# Altium PCB x-Diodes on Back SIde.PcbDoc
Units mm, origin at the board's own origin, x right, y up, seen from the top; angles counter-clockwise.
Board outline 326 x 80 mm, 2 copper layers (Top Layer, Bottom Layer); 161 components, 66 nets, 322 pads, 38 vias.
Unrouted connection lines stored in the file: 8.
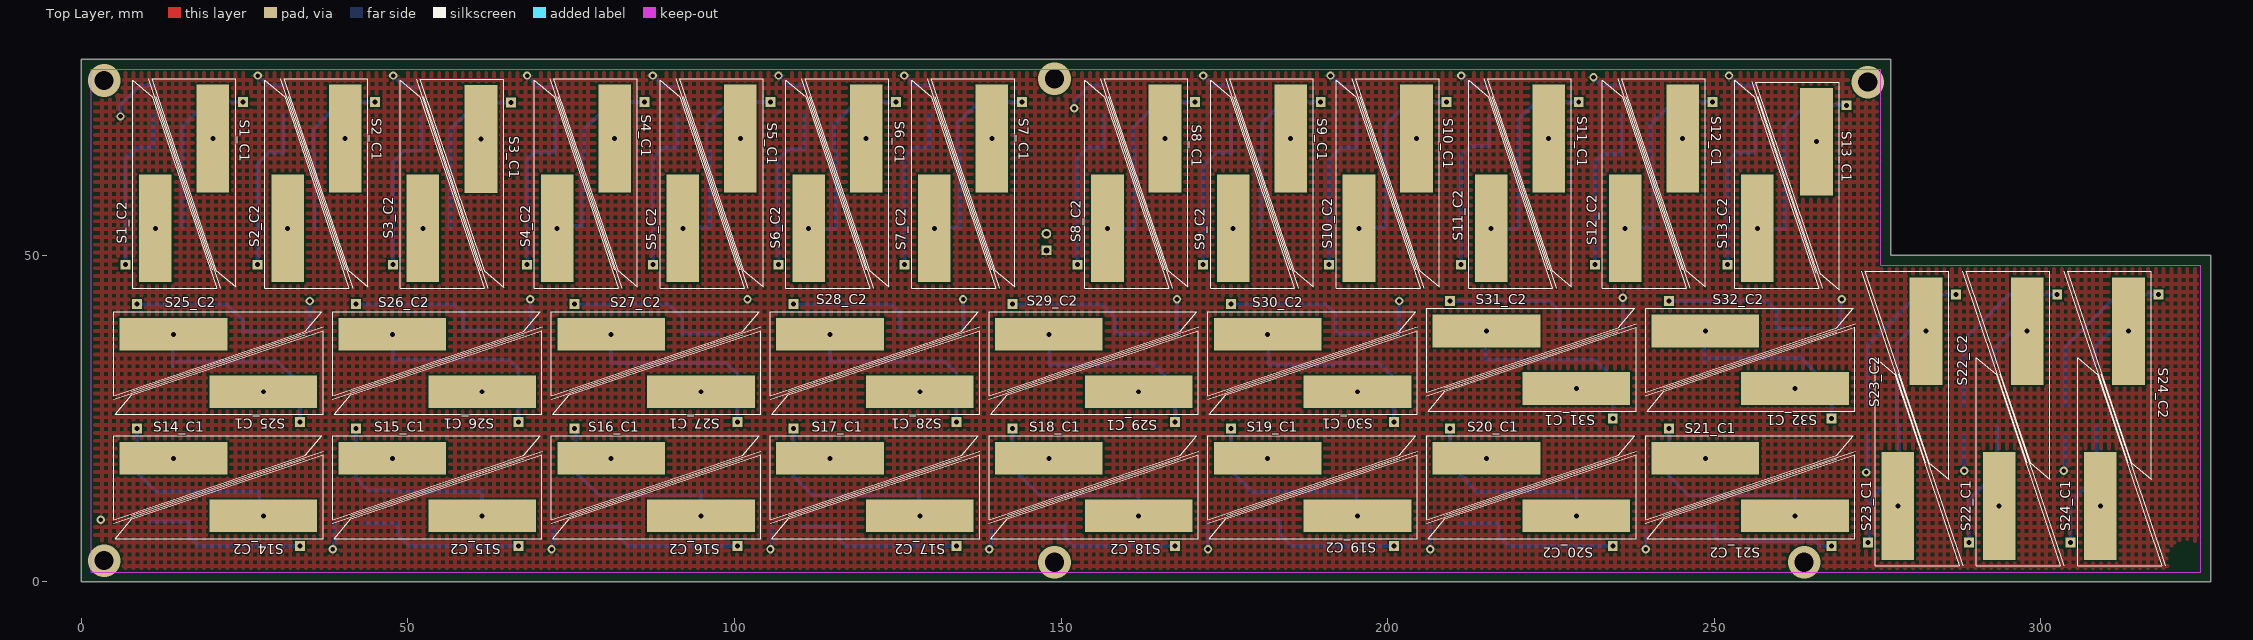
[diagram p0: Top Layer view]
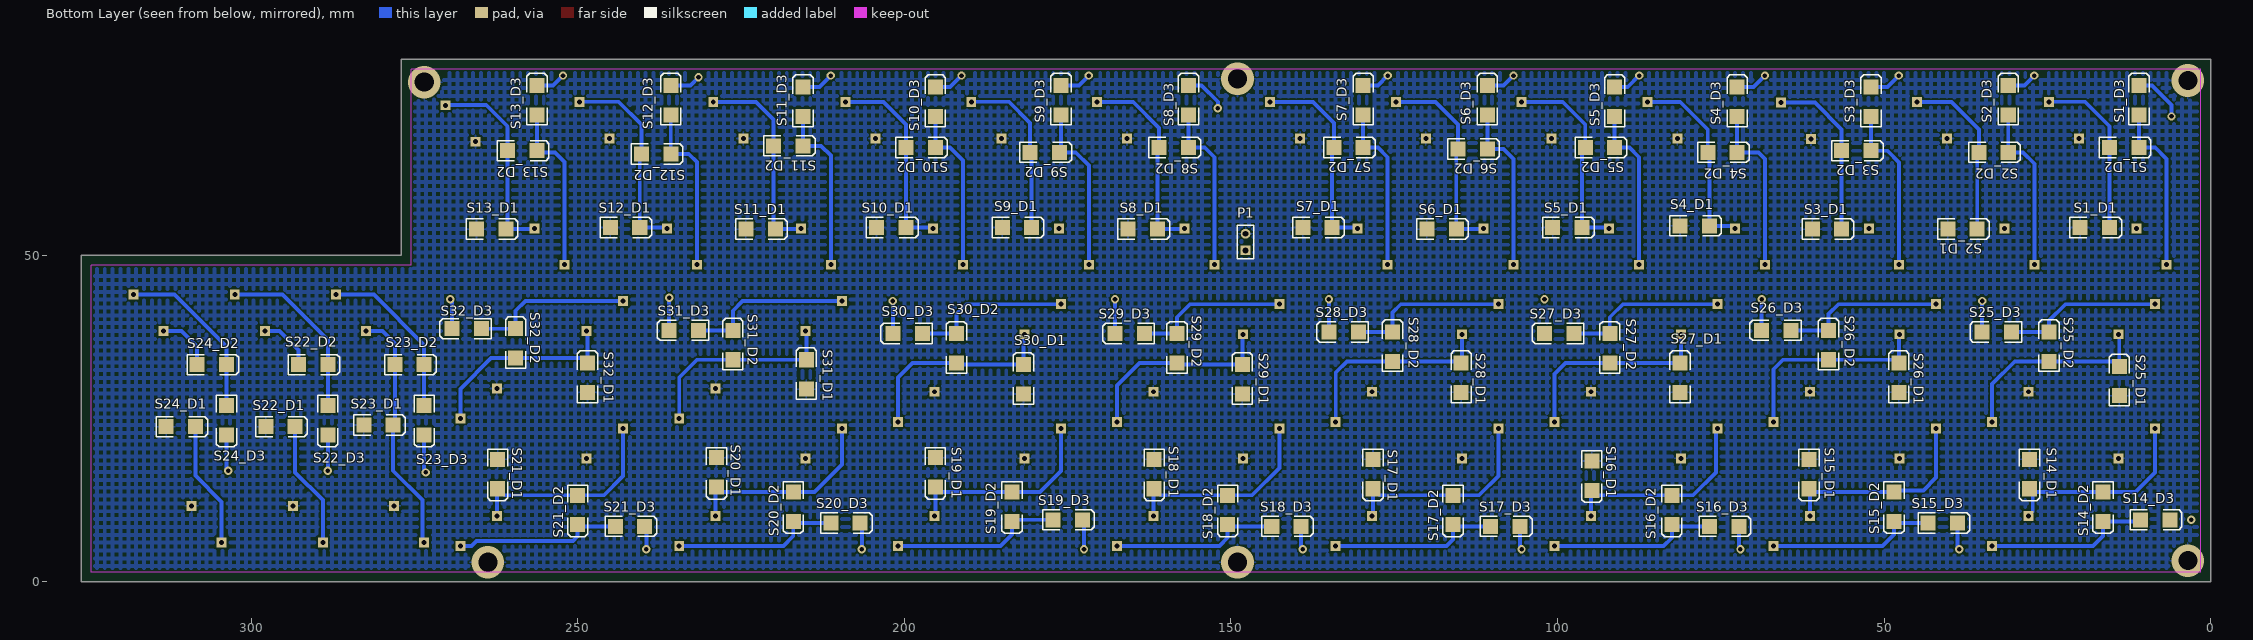
[diagram p1: Bottom Layer view, seen from below]

## Layer stack, top to bottom
Top Solder: solder mask 0.0102, Solder Resist, Dk 3.5
Top Layer: signal copper 0.0356
Dielectric 1: dielectric 0.32, FR-4, Dk 4.8
Bottom Layer: signal copper 0.0356
Bottom Solder: solder mask 0.0102, Solder Resist, Dk 3.5

## Board outline
0,0 326,0 326,50 277,50 277,80 0,80

## Design rules (kind name [scope] priority, off if disabled: settings)
Clearance [All] p1: gap=0.254
MinimumSolderMaskSliver [All] p1: minsoldermaskwidth=0.025
PolygonConnect [All] p1: connectstyle=Relief reliefconductorwidth=0.254 reliefentries=4 polygonreliefangle="90 Angle" airgapwidth=0.254
RoomDefinition "x-Diodes on Back Side" [InComponentClass('x-Diodes on Back Side')] p1: confinementstyle=ConfineIn formatcopy=TRUE lockcomponents=FALSE outline -292,-78 -241.2,-78 -241.2,-52.6 -292,-52.6
RoutingVias [All] p1: holewidth=0.711 width=1.27 viastyle="Through Hole" minholewidth=0.711 minwidth=1.27 maxholewidth=0.711 maxwidth=1.27
SilkToSolderMaskClearance [IsPad] p1: minsilkscreentomaskgap=0.025 clearancetoexposedcopper=TRUE
SolderMaskExpansion [All] p1: expansion=0.102
Width [All] p1: maxlimit=0.6 minlimit=0.6 preferedwidth=0.6
28 further rules are at their usual default settings.

## Components (designator, comment, footprint, x,y, rotation, side; value= is the part's Value field where it differs from the comment)
P1 "Header 2" HDR1X2 147.75,50.75 r90 bottom
S1_C1 "TASC" PCBComponent_1 24.75,73.5 r180 top
S1_C2 "TASC" PCBComponent_1 6.75,48.5 r0 top
S1_D1 "D Schottky" SMB 17.75,54.25 r180 bottom
S1_D2 "D Schottky" SMB 13.25,66.5 r180 bottom
S1_D3 "D Schottky" SMB 11,73.75 r90 bottom
S2_C1 "TASC" PCBComponent_1 45,73.5 r180 top
S2_C2 "TASC" PCBComponent_1 27,48.5 r0 top
S2_D1 "D Schottky" SMB 38,54 r180 bottom
S2_D2 "D Schottky" SMB 33.25,65.75 r180 bottom
S2_D3 "D Schottky" SMB 31,73.75 r90 bottom
S3_C1 "TASC" PCBComponent_1 65.8,73.4 r180 top
S3_C2 "TASC" PCBComponent_1 47.7,48.5 r0 top
S3_D1 "D Schottky" SMB 58.75,54 r180 bottom
S3_D2 "D Schottky" SMB 54.25,66 r180 bottom
S3_D3 "D Schottky" SMB 52,73.5 r90 bottom
S4_C1 "TASC" PCBComponent_1 86.25,73.5 r180 top
S4_C2 "TASC" PCBComponent_1 68.25,48.5 r0 top
S4_D1 "D Schottky" SMB 79,54.5 r180 bottom
S4_D2 "D Schottky" SMB 74.75,65.75 r180 bottom
S4_D3 "D Schottky" SMB 72.5,73.5 r90 bottom
S5_C1 "TASC" PCBComponent_1 105.5,73.5 r180 top
S5_C2 "TASC" PCBComponent_1 87.5,48.5 r0 top
S5_D1 "D Schottky" SMB 98.5,54.25 r180 bottom
S5_D2 "D Schottky" SMB 93.5,66.5 r180 bottom
S5_D3 "D Schottky" SMB 91.25,73.5 r90 bottom
S6_C1 "TASC" PCBComponent_1 124.75,73.5 r180 top
S6_C2 "TASC" PCBComponent_1 106.75,48.5 r0 top
S6_D1 "D Schottky" SMB 117.75,54 r180 bottom
S6_D2 "D Schottky" SMB 113,66.25 r180 bottom
S6_D3 "D Schottky" SMB 110.75,73.75 r90 bottom
S7_C1 "TASC" PCBComponent_1 144,73.5 r180 top
S7_C2 "TASC" PCBComponent_1 126,48.5 r0 top
S7_D1 "D Schottky" SMB 136.75,54.25 r180 bottom
S7_D2 "D Schottky" SMB 132,66.5 r180 bottom
S7_D3 "D Schottky" SMB 129.75,73.75 r90 bottom
S8_C1 "TASC" PCBComponent_1 170.5,73.5 r180 top
S8_C2 "TASC" PCBComponent_1 152.5,48.5 r0 top
S8_D1 "D Schottky" SMB 163.5,54 r180 bottom
S8_D2 "D Schottky" SMB 158.75,66.5 r180 bottom
S8_D3 "D Schottky" SMB 156.5,73.75 r90 bottom
S9_C1 "TASC" PCBComponent_1 189.75,73.5 r180 top
S9_C2 "TASC" PCBComponent_1 171.75,48.5 r0 top
S9_D1 "D Schottky" SMB 182.75,54.25 r180 bottom
S9_D2 "D Schottky" SMB 178.5,65.75 r180 bottom
S9_D3 "D Schottky" SMB 176,73.75 r90 bottom
S10_C1 "TASC" PCBComponent_1 209,73.5 r180 top
S10_C2 "TASC" PCBComponent_1 191,48.5 r0 top
S10_D1 "D Schottky" SMB 202,54.25 r180 bottom
S10_D2 "D Schottky" SMB 197.5,66.5 r180 bottom
S10_D3 "D Schottky" SMB 195.25,73.5 r90 bottom
S11_C1 "TASC" PCBComponent_1 229.25,73.5 r180 top
S11_C2 "TASC" PCBComponent_1 211.25,48.5 r0 top
S11_D1 "D Schottky" SMB 222,54 r180 bottom
S11_D2 "D Schottky" SMB 217.75,66.75 r180 bottom
S11_D3 "D Schottky" SMB 215.5,73.5 r90 bottom
S12_C1 "TASC" PCBComponent_1 249.75,73.5 r180 top
S12_C2 "TASC" PCBComponent_1 231.75,48.5 r0 top
S12_D1 "D Schottky" SMB 242.75,54.25 r180 bottom
S12_D2 "D Schottky" SMB 238,65.5 r180 bottom
S12_D3 "D Schottky" SMB 235.75,73.75 r90 bottom
S13_C1 "TASC" PCBComponent_1 270.25,73 r180 top
S13_C2 "TASC" PCBComponent_1 252,48.5 r0 top
S13_D1 "D Schottky" SMB 263.25,54 r180 bottom
S13_D2 "D Schottky" SMB 258.5,66 r180 bottom
S13_D3 "D Schottky" SMB 256.25,73.75 r90 bottom
S14_C1 "TASC" PCBComponent_1 8.5,23.5 r270 top
S14_C2 "TASC" PCBComponent_1 33.5,5.5 r90 top
S14_D1 "D Schottky" SMB 27.75,16.5 r270 bottom
S14_D2 "D Schottky" SMB 16.5,11.5 r270 bottom
S14_D3 "D Schottky" SMB 8.5,9.5 r180 bottom
S15_C1 "TASC" PCBComponent_1 42,23.5 r270 top
S15_C2 "TASC" PCBComponent_1 67,5.5 r90 top
S15_D1 "D Schottky" SMB 61.5,16.5 r270 bottom
S15_D2 "D Schottky" SMB 48.5,11.5 r270 bottom
S15_D3 "D Schottky" SMB 41,9 r180 bottom
S16_C1 "TASC" PCBComponent_1 75.5,23.5 r270 top
S16_C2 "TASC" PCBComponent_1 100.5,5.5 r90 top
S16_D1 "D Schottky" SMB 94.75,16.25 r270 bottom
S16_D2 "D Schottky" SMB 82.5,11 r270 bottom
S16_D3 "D Schottky" SMB 74.5,8.5 r180 bottom
S17_C1 "TASC" PCBComponent_1 109,23.5 r270 top
S17_C2 "TASC" PCBComponent_1 134,5.5 r90 top
S17_D1 "D Schottky" SMB 128.25,16.5 r270 bottom
S17_D2 "D Schottky" SMB 116,11 r270 bottom
S17_D3 "D Schottky" SMB 108,8.5 r180 bottom
S18_C1 "TASC" PCBComponent_1 142.5,23.5 r270 top
S18_C2 "TASC" PCBComponent_1 167.5,5.5 r90 top
S18_D1 "D Schottky" SMB 161.75,16.5 r270 bottom
S18_D2 "D Schottky" SMB 150.5,11 r270 bottom
S18_D3 "D Schottky" SMB 141.5,8.5 r180 bottom
S19_C1 "TASC" PCBComponent_1 176,23.5 r270 top
S19_C2 "TASC" PCBComponent_1 201,5.5 r90 top
S19_D1 "D Schottky" SMB 195.25,16.75 r270 bottom
S19_D2 "D Schottky" SMB 183.5,11.5 r270 bottom
S19_D3 "D Schottky" SMB 175,9.5 r180 bottom
S20_C1 "TASC" PCBComponent_1 209.5,23.5 r270 top
S20_C2 "TASC" PCBComponent_1 234.5,5.5 r90 top
S20_D1 "D Schottky" SMB 228.75,16.75 r270 bottom
S20_D2 "D Schottky" SMB 217,11.5 r270 bottom
S20_D3 "D Schottky" SMB 209,9 r180 bottom
S21_C1 "TASC" PCBComponent_1 243,23.5 r270 top
S21_C2 "TASC" PCBComponent_1 268,5.5 r90 top
S21_D1 "D Schottky" SMB 262.25,16.5 r270 bottom
S21_D2 "D Schottky" SMB 250,11 r270 bottom
S21_D3 "D Schottky" SMB 242,8.5 r180 bottom
S22_C1 "TASC" PCBComponent_1 289,6 r0 top
S22_C2 "TASC" PCBComponent_1 302.5,44 r180 top
S22_D1 "D Schottky" SMB 295.5,23.75 r180 bottom
S22_D2 "D Schottky" SMB 290.5,33.25 r180 bottom
S22_D3 "D Schottky" SMB 288.25,24.75 r270 bottom
S23_C1 "TASC" PCBComponent_1 273.5,6 r0 top
S23_C2 "TASC" PCBComponent_1 287,44 r180 top
S23_D1 "D Schottky" SMB 280.5,24 r180 bottom
S23_D2 "D Schottky" SMB 275.75,33.25 r180 bottom
S23_D3 "D Schottky" SMB 273.5,24.75 r270 bottom
S24_C1 "TASC" PCBComponent_1 304.5,6 r0 top
S24_C2 "TASC" PCBComponent_1 318,44 r180 top
S24_D1 "D Schottky" SMB 310.75,23.75 r180 bottom
S24_D2 "D Schottky" SMB 306,33.25 r180 bottom
S24_D3 "D Schottky" SMB 303.75,24.75 r270 bottom
S25_C1 "TASC" PCBComponent_1 33.5,24.5 r90 top
S25_C2 "TASC" PCBComponent_1 8.5,42.5 r270 top
S25_D1 "D Schottky" SMB 14,30.75 r90 bottom
S25_D2 "D Schottky" SMB 24.75,36 r90 bottom
S25_D3 "D Schottky" SMB 32.75,38.25 r0 bottom
S26_C1 "TASC" PCBComponent_1 67,24.5 r90 top
S26_C2 "TASC" PCBComponent_1 42,42.5 r270 top
S26_D1 "D Schottky" SMB 47.75,31.25 r90 bottom
S26_D2 "D Schottky" SMB 58.5,36.25 r90 bottom
S26_D3 "D Schottky" SMB 66.5,38.5 r0 bottom
S27_C1 "TASC" PCBComponent_1 100.5,24.5 r90 top
S27_C2 "TASC" PCBComponent_1 75.5,42.5 r270 top
S27_D1 "D Schottky" SMB 81.25,31.25 r90 bottom
S27_D2 "D Schottky" SMB 92,35.75 r90 bottom
S27_D3 "D Schottky" SMB 99.75,38 r0 bottom
S28_C1 "TASC" PCBComponent_1 134,24.5 r90 top
S28_C2 "TASC" PCBComponent_1 109,42.5 r270 top
S28_D1 "D Schottky" SMB 114.75,31.25 r90 bottom
S28_D2 "D Schottky" SMB 125.25,36 r90 bottom
S28_D3 "D Schottky" SMB 132.75,38.25 r0 bottom
S29_C1 "TASC" PCBComponent_1 167.5,24.5 r90 top
S29_C2 "TASC" PCBComponent_1 142.5,42.5 r270 top
S29_D1 "D Schottky" SMB 148.25,31 r90 bottom
S29_D2 "D Schottky" SMB 158.25,35.75 r90 bottom
S29_D3 "D Schottky" SMB 165.5,38 r0 bottom
S30_C1 "TASC" PCBComponent_1 201,24.5 r90 top
S30_C2 "TASC" PCBComponent_1 176,42.5 r270 top
S30_D1 "D Schottky" SMB 181.75,31 r90 bottom
S30_D2 "D Schottky" SMB 192,35.75 r90 bottom
S30_D3 "D Schottky" SMB 199.5,38 r0 bottom
S31_C1 "TASC" PCBComponent_1 234.5,25 r90 top
S31_C2 "TASC" PCBComponent_1 209.5,43 r270 top
S31_D1 "D Schottky" SMB 215,31.75 r90 bottom
S31_D2 "D Schottky" SMB 226.25,36.25 r90 bottom
S31_D3 "D Schottky" SMB 233.75,38.5 r0 bottom
S32_C1 "TASC" PCBComponent_1 268,25 r90 top
S32_C2 "TASC" PCBComponent_1 243,43 r270 top
S32_D1 "D Schottky" SMB 248.5,31.25 r90 bottom
S32_D2 "D Schottky" SMB 259.5,36.5 r90 bottom
S32_D3 "D Schottky" SMB 267,38.75 r0 bottom

## Footprints (in the part's own frame and the unit in brackets; to place one, negate y for a bottom-side part, rotate by r counter-clockwise, add the part's x,y. Pads: shape width x height; smd on the part's side, far side on the other; paste and mask are expansions set on the pad)
HDR1X2 [mm] "Connector; Header; 2 Position"
  rect 1.5x1.5 hole 0.9: 1(0,0)
  round 1.5 hole 0.9: 2(2.54,0)
  silkscreen extent -1.27,-1.27 3.81,1.27
PCBComponent_1 [mm]
  rect 1.524x1.524 hole 0.762: 1(0,0.044)
  rect 5x16.5 / inner rect 1.524x1.524 / far side rect 1.524x1.524 hole 0.762: 2(4.6,5.625)
  silkscreen extent 1.13,-3.55 14.53,28.3
SMB [mm] "DO-214-AA/SMB; 2 C-Bend Leads; Body 5.3 x 3.6 mm, inc. leads (LxW)"
  rect 2.3x2.3 smd: 1(-2.25,0) 2(2.25,0)
  silkscreen extent -3.8,-1.55 4.1,1.55

## Part data
P1: "Header, 2-Pin"
S1_C1 S1_C2 S2_C1 S2_C2 S3_C1 S3_C2 S4_C1 S4_C2 S5_C1 S5_C2 S6_C1 S6_C2 S7_C1 S7_C2 S8_C1 S8_C2 S9_C1 S9_C2 S10_C1 S10_C2 S11_C1 S11_C2 S12_C1 S12_C2 S13_C1 S13_C2 S14_C1 S14_C2 S15_C1 S15_C2 S16_C1 S16_C2 S17_C1 S17_C2 S18_C1 S18_C2 S19_C1 S19_C2 S20_C1 S20_C2 S21_C1 S21_C2 S22_C1 S22_C2 S23_C1 S23_C2 S24_C1 S24_C2 S25_C1 S25_C2 S26_C1 S26_C2 S27_C1 S27_C2 S28_C1 S28_C2 S29_C1 S29_C2 S30_C1 S30_C2 S31_C1 S31_C2 S32_C1 S32_C2: "TASC Solar Cell"
S1_D1 S1_D2 S1_D3 S2_D1 S2_D2 S2_D3 S3_D1 S3_D2 S3_D3 S4_D1 S4_D2 S4_D3 S5_D1 S5_D2 S5_D3 S6_D1 S6_D2 S6_D3 S7_D1 S7_D2 S7_D3 S8_D1 S8_D2 S8_D3 S9_D1 S9_D2 S9_D3 S10_D1 S10_D2 S10_D3 S11_D1 S11_D2 S11_D3 S12_D1 S12_D2 S12_D3 S13_D1 S13_D2 S13_D3 S14_D1 S14_D2 S14_D3 S15_D1 S15_D2 S15_D3 S16_D1 S16_D2 S16_D3 S17_D1 S17_D2 S17_D3 S18_D1 S18_D2 S18_D3 S19_D1 S19_D2 S19_D3 S20_D1 S20_D2 S20_D3 S21_D1 S21_D2 S21_D3 S22_D1 S22_D2 S22_D3 S23_D1 S23_D2 S23_D3 S24_D1 S24_D2 S24_D3 S25_D1 S25_D2 S25_D3 S26_D1 S26_D2 S26_D3 S27_D1 S27_D2 S27_D3 S28_D1 S28_D2 S28_D3 S29_D1 S29_D2 S29_D3 S30_D1 S30_D2 S30_D3 S31_D1 S31_D2 S31_D3 S32_D1 S32_D2 S32_D3: "Schottky Diode"

## Via types
v1: diameter 1.27, hole 0.711, Top Layer to Bottom Layer, 32 vias
v2: diameter 5, hole 2.946, Top Layer to Bottom Layer, 6 vias

## Nets (pads, with @x,y where several pads share a name; then routed paths per layer and width w, separated by ;. In a path a pad name is that pad's centre, name@x,y a point inside that pad or via, vN(x,y) a via of type N, cw(c..) or ccw(c..) an arc to the next point about the centre after c; other vN are vias at no path point)
GND: P1.2 S1_C1.2 S1_D1.1 S2_C1.2 S2_D1.1 S3_C1.2 S3_D1.1 S4_C1.2 S4_D1.1 S5_C1.2 S5_D1.1 S6_C1.2 S6_D1.1 S7_C1.2 S7_D1.1 S8_C1.2 S8_D1.1 S9_C1.2 S9_D1.1 S10_C1.2 S10_D1.1 S11_C1.2 S11_D1.1 S12_C1.2 S12_D1.1 S13_C1.2 S13_D1.1 S14_C1.2 S14_D1.1 S15_C1.2 S15_D1.1 S16_C1.2 S16_D1.1 S17_C1.2 S17_D1.1 S18_C1.2 S18_D1.1 S19_C1.2 S19_D1.1 S20_C1.2 S20_D1.1 S21_C1.2 S21_D1.1 S22_C1.2 S22_D1.1 S23_C1.2 S23_D1.1 S24_C1.2 S24_D1.1 S25_C1.2 S25_D1.1 S26_C1.2 S26_D1.1 S27_C1.2 S27_D1.1 S28_C1.2 S28_D1.1 S29_C1.2 S29_D1.1 S30_C1.2 S30_D1.1 S31_C1.2 S31_D1.1 S32_C1.2 S32_D1.1
  other v2: 149,3 263.75,3 3.5,3.25 273.5,76.5 3.5,76.75 149,77
NetS1_C1_1: S1_C1.1 S1_C2.2 S1_D1.2 S1_D2.1 | length 26.3
  Bottom Layer w0.6: S1_D1.2 S1_D2.1 15.5,69.75 19.25,73.5 S1_C1.1@24.706,73.5
NetS1_C2_1: S1_C2.1 S1_D2.2 S1_D3.1 | length 26.2
  Bottom Layer w0.6: S1_C2.1 6.75,64.75 8.5,66.5 S1_D2.2 S1_D3.1
NetS2_C1_1: S2_C1.1 S2_C2.2 S2_D1.2 S2_D2.1 | length 26.2
  Bottom Layer w0.6: S2_D2.1 35.5,69.25 39.706,73.456 S2_C1.1 ; S2_D1.2 S2_D2.1@35.75,65.5
NetS2_C2_1: S2_C2.1 S2_D2.2 S2_D3.1 | length 25.9
  Bottom Layer w0.6: S2_C2.1 27,64 28.75,65.75 S2_D2.2 S2_D3.1
NetS3_C1_1: S3_C1.1 S3_C2.2 S3_D1.2 S3_D2.1 | length 26.3
  Bottom Layer w0.6: S3_D1.2 S3_D2.1 56.5,69.25 60.606,73.356 S3_C1.1
NetS3_C2_1: S3_C2.1 S3_D2.2 S3_D3.1 | length 26
  Bottom Layer w0.6: S3_C2.1 47.7,64.2 49.5,66 S3_D2.2 S3_D3.1
NetS4_C1_1: S4_C1.1 S4_C2.2 S4_D1.2 S4_D2.1 | length 29
  Bottom Layer w0.6: S4_C2.2@73.225,54.5 S4_D1.2 S4_D2.1@76.75,65.5 ; S4_D2.1 77,69.25 81.206,73.456 S4_C1.1
NetS4_C2_1: S4_C2.1 S4_D2.2 S4_D3.1 | length 26.4
  Bottom Layer w0.6: S4_C2.1 68.25,64.75 69.25,65.75 S4_D2.2 S4_D3.1
NetS5_C1_1: S5_C1.1 S5_C2.2 S5_D1.2 S5_D2.1 | length 30.5
  Bottom Layer w0.6: S5_C2.2@92.225,54.25 S5_D1.2 S5_D2.1@96.25,66 ; S5_D2.1 95.75,70 99.206,73.456 S5_C1.1
NetS5_C2_1: S5_C2.1 S5_D2.2 S5_D3.1 | length 25.6
  Bottom Layer w0.6: S5_C2.1 87.5,65 89,66.5 S5_D2.2 S5_D3.1
NetS6_C1_1: S6_C1.1 S6_C2.2 S6_D1.2 S6_D2.1 | length 30.7
  Bottom Layer w0.6: S6_C2.2@111.475,54 S6_D1.2 S6_D2.1@115.5,66 ; S6_D2.1 115.25,70 118.706,73.456 S6_C1.1
NetS6_C2_1: S6_C2.1 S6_D2.2 S6_D3.1 | length 26.1
  Bottom Layer w0.6: S6_C2.1 106.75,64.75 108.25,66.25 S6_D2.2 S6_D3.1
NetS7_C1_1: S7_C1.1 S7_C2.2 S7_D1.2 S7_D2.1 | length 30.6
  Bottom Layer w0.6: S7_C2.2@130.725,54.25 S7_D1.2 S7_D2.1@134.5,66.25 ; S7_D2.1 134.25,70.25 137.456,73.456 S7_C1.1
NetS7_C2_1: S7_C2.1 S7_D2.2 S7_D3.1 | length 25.8
  Bottom Layer w0.6: S7_C2.1 126,65 127.5,66.5 S7_D2.2 S7_D3.1
NetS8_C1_1: S8_C1.1 S8_C2.2 S8_D1.2 S8_D2.1 | length 30.4
  Bottom Layer w0.6: S8_C2.2@157.225,54 S8_D1.2 S8_D2.1@161.25,66.25 ; S8_D2.1 161,69.5 164.956,73.456 S8_C1.1
NetS8_C2_1: S8_C2.1 S8_D2.2 S8_D3.1 | length 26.1
  Bottom Layer w0.6: S8_C2.1 152.5,65 154,66.5 S8_D2.2 S8_D3.1
NetS9_C1_1: S9_C1.1 S9_C2.2 S9_D1.2 S9_D2.1 | length 26.1
  Bottom Layer w0.6: S9_D1.2 S9_D2.1@180.5,65.5 ; S9_D2.1 180.75,70.25 184,73.5 S9_C1.1@189.706,73.5
NetS9_C2_1: S9_C2.1 S9_D2.2 S9_D3.1 | length 26
  Bottom Layer w0.6: S9_C2.1 171.75,63.75 173.75,65.75 S9_D2.2 ; S9_D2.2@176,66 S9_D3.1
NetS10_C1_1: S10_C1.1 S10_C2.2 S10_D1.2 S10_D2.1 | length 30.5
  Bottom Layer w0.6: S10_C2.2@195.725,54.25 S10_D1.2 S10_D2.1 199.75,70 203.206,73.456 S10_C1.1
NetS10_C2_1: S10_C2.1 S10_D2.2 S10_D3.1 | length 25.8
  Bottom Layer w0.6: S10_C2.1 191,64.5 193,66.5 S10_D2.2 S10_D3.1
NetS11_C1_1: S11_C1.1 S11_C2.2 S11_D1.2 S11_D2.1 | length 30.6
  Bottom Layer w0.6: S11_C2.2@215.975,54 S11_D1.2 ; S11_D1.2@220,54.25 S11_D2.1 220,70.75 222.706,73.456 S11_C1.1
NetS11_C2_1: S11_C2.1 S11_D2.2 S11_D3.1 | length 26.1
  Bottom Layer w0.6: S11_C2.1 211.25,65.25 212.75,66.75 S11_D2.2 S11_D3.1
NetS12_C1_1: S12_C1.1 S12_C2.2 S12_D1.2 S12_D2.1 | length 30.5
  Bottom Layer w0.6: S12_C2.2@236.475,54.25 S12_D1.2 S12_D2.1@240.5,65.25 ; S12_D2.1 240.25,70 243.75,73.5 249.706,73.5 S12_C1.1
NetS12_C2_1: S12_C2.1 S12_D2.2 S12_D3.1 | length 26.2
  Bottom Layer w0.6: S12_C2.1 231.75,64.25 233,65.5 S12_D2.2 S12_D3.1
NetS13_C1_1: S13_C1.1 S13_C2.2 S13_D1.2 S13_D2.1 | length 30.6
  Bottom Layer w0.6: S13_C2.2@256.725,54 S13_D1.2 ; S13_D1.2@260.75,54.25 S13_D2.1 260.75,69.75 264,73 270.206,73 S13_C1.1
NetS13_C2_1: S13_C2.1 S13_D2.2 S13_D3.1 | length 26.2
  Bottom Layer w0.6: S13_C2.1 252,64.25 253.5,65.75 256,65.75 S13_D2.2 S13_D3.1
NetS14_C1_1: S14_C1.1 S14_C2.2 S14_D1.2 S14_D2.1 | length 30.6
  Bottom Layer w0.6: S14_C1.1 8.544,16.706 11.5,13.75 S14_D2.1 27.25,13.75 27.25,10.725 S14_C2.2
NetS14_C2_1: S14_C2.1 S14_D2.2 S14_D3.1 | length 25.8
  Bottom Layer w0.6: S14_D3.1@10.5,9.25 S14_D2.2 16.5,7 18,5.5 S14_C2.1
NetS15_C1_1: S15_C1.1 S15_C2.2 S15_D1.2 S15_D2.1 | length 31.4
  Bottom Layer w0.6: S15_C1.1 42.044,15.956 44,14 48.25,14 S15_D2.1 S15_D1.2@61,13.75 ; S15_C2.2 S15_D1.2@61.375,14.125
NetS15_C2_1: S15_C2.1 S15_D2.2 S15_D3.1 | length 26.2
  Bottom Layer w0.6: S15_D3.1 S15_D2.2@48.25,9 ; S15_D2.2 48.5,7.25 50.25,5.5 S15_C2.1
NetS16_C1_1: S16_C1.1 S16_C2.2 S16_D1.2 S16_D2.1 | length 30
  Bottom Layer w0.6: S16_C1.1@75.75,23.294 75.75,16.75 79.25,13.25 S16_D2.1 S16_D1.2@94,13.25 ; S16_C2.2 S16_D1.2@94.875,13.875
NetS16_C2_1: S16_C2.1 S16_D2.2 S16_D3.1 | length 26
  Bottom Layer w0.6: S16_D3.1 S16_D2.2@82.25,8.5 ; S16_D2.2 82.5,6.75 83.75,5.5 S16_C2.1
NetS17_C1_1: S17_C1.1 S17_C2.2 S17_D1.2 S17_D2.1 | length 30.7
  Bottom Layer w0.6: S17_C1.1 109.044,16.206 112,13.25 S17_D2.1 S17_D1.2@127.25,13.25 ; S17_C2.2@128.25,10.225 S17_D1.2
NetS17_C2_1: S17_C2.1 S17_D2.2 S17_D3.1 | length 26.1
  Bottom Layer w0.6: S17_D3.1 S17_D2.2@115.75,8.5 ; S17_D2.2 116,6.5 117,5.5 S17_C2.1
NetS18_C1_1: S18_C1.1 S18_C2.2 S18_D1.2 S18_D2.1 | length 30
  Bottom Layer w0.6: S18_C1.1 142.544,17.456 146.75,13.25 S18_D2.1 S18_D1.2@160.75,13.25 ; S18_C2.2 S18_D1.2@161.875,14.125
NetS18_C2_1: S18_C2.1 S18_D2.2 S18_D3.1 | length 26
  Bottom Layer w0.6: S18_D3.1 S18_D2.2@150.25,8.5 ; S18_D2.2 150.5,6.75 151.75,5.5 S18_C2.1
NetS19_C1_1: S19_C1.1 S19_C2.2 S19_D1.2 S19_D2.1 | length 30.6
  Bottom Layer w0.6: S19_C1.1 176.044,16.956 179.25,13.75 S19_D2.1 S19_D1.2@194.5,13.75 ; S19_C2.2@195.25,10.225 S19_D1.2
NetS19_C2_1: S19_C2.1 S19_D2.2 S19_D3.1 | length 26.2
  Bottom Layer w0.6: S19_D3.1 S19_D2.2@183.25,9.5 ; S19_D2.2 183.5,7.25 185.25,5.5 S19_C2.1
NetS20_C1_1: S20_C1.1 S20_C2.2 S20_D1.2 S20_D2.1 | length 30
  Bottom Layer w0.6: S20_C1.1 209.544,17.956 213.75,13.75 S20_D2.1 S20_D1.2@228,13.75 ; S20_C2.2 S20_D1.2@228.875,14.375
NetS20_C2_1: S20_C2.1 S20_D2.2 S20_D3.1 | length 26.2
  Bottom Layer w0.6: S20_D3.1@211.5,9.25 S20_D3.1 S20_D2.2@216.75,9 ; S20_D2.2 217,7 218.5,5.5 S20_C2.1
NetS21_C1_1: S21_C1.1 S21_C2.2 S21_D1.2 S21_D2.1 | length 30.7
  Bottom Layer w0.6: S21_C1.1 243.044,16.206 246,13.25 S21_D2.1 S21_D1.2@261.25,13.25 ; S21_C2.2 S21_D1.2@262.375,14.125
NetS21_C2_1: S21_C2.1 S21_D2.2 S21_D3.1 | length 25.8
  Bottom Layer w0.6: S21_D3.1 S21_D2.2@249.75,8.5 ; S21_D2.2 250,7 250.75,6.25 265.5,6.25 266.25,5.5 S21_C2.1
NetS22_C1_1: S22_C1.1 S22_C2.2 S22_D1.2 S22_D2.1 | length 28.1
  Bottom Layer w0.6: S22_C1.1 289,12.5 293.25,16.75 S22_D1.2 ; S22_D2.1 292.75,35.5 295.625,38.375 S22_C2.2
NetS22_C2_1: S22_C2.1 S22_D2.2 S22_D3.1 | length 27.1
  Bottom Layer w0.6: S22_D3.1 S22_D2.2 288.25,37 295.206,43.956 S22_C2.1
NetS23_C1_1: S23_C1.1 S23_C2.2 S23_D1.2 S23_D2.1 | length 37
  Bottom Layer w0.6: S23_C1.1@273.75,6.294 273.75,12.5 278.25,17 S23_D1.2 ; S23_D1.2@278,24.25 S23_D2.1 278,36.5 279.875,38.375 S23_C2.2
NetS23_C2_1: S23_C2.1 S23_D2.2 S23_D3.1 | length 25.9
  Bottom Layer w0.6: S23_D3.1 S23_D2.2 273.5,36.25 281.206,43.956 S23_C2.1
NetS24_C1_1: S24_C1.1 S24_C2.2 S24_D1.2 S24_D2.1 | length 28.2
  Bottom Layer w0.6: S24_C1.1 304.5,12.25 308.5,16.25 S24_D1.2 ; S24_D2.1 308.25,36 310.625,38.375 S24_C2.2
NetS24_C2_1: S24_C2.1 S24_D2.2 S24_D3.1 | length 26.5
  Bottom Layer w0.6: S24_D3.1 S24_D2.2 303.75,36 311.706,43.956 S24_C2.1
NetS25_C1_1: S25_C1.1 S25_C2.2 S25_D1.2 S25_D2.1 | length 30.7
  Bottom Layer w0.6: S25_D1.2 S25_C2.2@14,37.775 ; S25_D1.2@14.75,33.75 S25_D2.1 30,33.75 33.456,30.294 S25_C1.1
NetS25_C2_1: S25_C2.1 S25_D2.2 S25_D3.1 | length 24.7
  Bottom Layer w0.6: S25_C2.1 22.25,42.5 24.75,40 S25_D2.2 S25_D3.1
NetS26_C1_1: S26_C1.1 S26_C2.2 S26_D1.2 S26_D2.1 | length 31.6
  Bottom Layer w0.6: S26_D1.2 S26_C2.2@47.75,37.775 ; S26_D1.2@48.25,34 S26_D2.1 65.5,34 66.956,32.544 S26_C1.1
NetS26_C2_1: S26_C2.1 S26_D2.2 S26_D3.1 | length 25.3
  Bottom Layer w0.6: S26_C2.1 57,42.5 58.5,41 S26_D2.2 S26_D3.1
NetS27_C1_1: S27_C1.1 S27_C2.2 S27_D1.2 S27_D2.1 | length 31.7
  Bottom Layer w0.6: S27_C2.2 81.125,33.625 S27_D1.2 S27_D2.1 98.75,33.5 100.456,31.794 S27_C1.1
NetS27_C2_1: S27_C2.1 S27_D2.2 S27_D3.1 | length 25.3
  Bottom Layer w0.6: S27_C2.1 90,42.5 92,40.5 S27_D2.2 S27_D3.1
NetS28_C1_1: S28_C1.1 S28_C2.2 S28_D1.2 S28_D2.1 | length 31.5
  Bottom Layer w0.6: S28_D1.2@114.625,33.625 S28_C2.2 ; S28_D1.2@115,33.75 S28_D2.1 132.25,33.75 133.956,32.044 S28_C1.1
NetS28_C2_1: S28_C2.1 S28_D2.2 S28_D3.1 | length 25
  Bottom Layer w0.6: S28_C2.1 124,42.5 125.25,41.25 S28_D2.2 S28_D3.1
NetS29_C1_1: S29_C1.1 S29_C2.2 S29_D1.2 S29_D2.1 | length 30.5
  Bottom Layer w0.6: S29_C2.2@148.25,37.775 S29_D1.2 S29_D2.1@158,33.25 ; S29_D2.1 164,33.5 167.456,30.044 S29_C1.1
NetS29_C2_1: S29_C2.1 S29_D2.2 S29_D3.1 | length 24
  Bottom Layer w0.6: S29_C2.1 156.25,42.5 158.25,40.5 S29_D2.2 S29_D3.1
NetS30_C1_1: S30_C1.1 S30_C2.2 S30_D1.2 S30_D2.1 | length 31.2
  Bottom Layer w0.6: S30_C2.2@181.75,37.775 S30_D1.2 S30_D2.1@191.75,33.25 ; S30_D2.1 198.75,33.5 200.956,31.294 S30_C1.1
NetS30_C2_1: S30_C2.1 S30_D2.2 S30_D3.1 | length 24.8
  Bottom Layer w0.6: S30_C2.1 190.5,42.5 192,41 S30_D2.2 S30_D3.1
NetS31_C1_1: S31_C1.1 S31_C2.2 S31_D1.2 S31_D2.1 | length 31.1
  Bottom Layer w0.6: S31_C2.2@215,38.275 S31_D1.2 S31_D2.1 231.75,34 234.456,31.294 S31_C1.1
NetS31_C2_1: S31_C2.1 S31_D2.2 S31_D3.1 | length 25.6
  Bottom Layer w0.6: S31_C2.1 224.75,43 226.25,41.5 S31_D2.2 S31_D3.1
NetS32_C1_1: S32_C1.1 S32_C2.2 S32_D1.2 S32_D2.1 | length 30
  Bottom Layer w0.6: S32_D1.2 S32_C2.2@248.5,38.275 ; S32_D1.2@249.25,34.25 S32_D2.1 263.25,34.25 267.956,29.544 S32_C1.1
NetS32_C2_1: S32_C2.1 S32_D2.2 S32_D3.1 | length 25.1
  Bottom Layer w0.6: S32_C2.1 258,43 259.5,41.5 S32_D2.2 S32_D3.1
POWER: P1.1 S1_D3.2 S2_D3.2 S3_D3.2 S4_D3.2 S5_D3.2 S6_D3.2 S7_D3.2 S8_D3.2 S9_D3.2 S10_D3.2 S11_D3.2 S12_D3.2 S13_D3.2 S14_D3.2 S15_D3.2 S16_D3.2 S17_D3.2 S18_D3.2 S19_D3.2 S20_D3.2 S21_D3.2 S22_D3.2 S23_D3.2 S24_D3.2 S25_D3.2 S26_D3.2 S27_D3.2 S28_D3.2 S29_D3.2 S30_D3.2 S31_D3.2 S32_D3.2 | length 141.5
  Bottom Layer w0.6: v1(6,71.25) 6,73 9,76 S1_D3.2 ; v1(27,77.5) 28.5,76 S2_D3.2 ; S25_D3.2 v1(35,43) ; v1@38.75,5.25 S15_D3.2 ; v1(47.75,77.5) 49.5,75.75 S3_D3.2 ; v1(68.25,77.5) 70,75.75 S4_D3.2 ; S26_D3.2 v1(68.75,43.25) ; v1@72.25,5.25 S16_D3.2 ; v1(87.5,77.5) 89.25,75.75 S5_D3.2 ; v1@105.75,5.25 S17_D3.2 ; v1(106.75,77.5) 108.25,76 S6_D3.2 ; v1(126,77.5) 127.5,76 S7_D3.2 ; S28_D3.2 v1(135,43.25) ; v1@139.25,5.25 S18_D3.2 ; v1(152,72.5) 152,73.5 154.5,76 S8_D3.2 ; S29_D3.2 v1(167.75,43.25) ; v1(171.75,77.5) 173.25,76 S9_D3.2 ; v1(172.5,5) S19_D3.2@172.5,9.25 ; v1(191.25,77.5) 193,75.75 S10_D3.2 ; S30_D3.2 v1(201.75,43) ; v1(206.5,5) S20_D3.2@206.5,8.75 ; v1(211.25,77.5) 213,75.75 S11_D3.2 ; v1(231.5,77.25) 232.75,76 S12_D3.2 ; S31_D3.2 v1(236,43.5) ; v1(239.5,5) S21_D3.2@239.5,8.25 ; v1(252.25,77.5) 253.75,76 S13_D3.2 ; S32_D3.2 v1@269.25,43 ; v1@273.5,17 S23_D3.2 ; v1(288.25,17) S22_D3.2 ; v1@303.75,17.25 S24_D3.2
  other v1: 38.5,5 72,5 105.5,5 139,5 3,9.5 273.25,16.75 303.5,17 102,43.25 269.5,43.25
copper on no net: | length 0.3
  Bottom Layer w0.6: 102,43.25 102.25,43.25

## Polygon pours and split planes (outlines as drawn)
POWER on Top Layer "Top Layer - Positive" (hatched 90Degree grid 1.2 track 0.6, pour order 4): 1.5,1.5 324.5,1.5 324.5,48.5 275.5,48.5 275.5,78.5 1.5,78.5 1.5,1.5
GND on Bottom Layer "Top Layer - Positive" (hatched 90Degree grid 1.2 track 0.6, pour order 6): 1.5,1.5 324.5,1.5 324.5,48.5 275.5,48.5 275.5,78.5 1.5,78.5 1.5,1.5

## Keep-outs
Keep-Out Layer:
  lines w0.1: 1.5,1.5 324.5,1.5 324.5,48.5 275.5,48.5 275.5,78.5 1.5,78.5 1.5,1.5